# EAGLE board final (EAGLE 9.6.2)
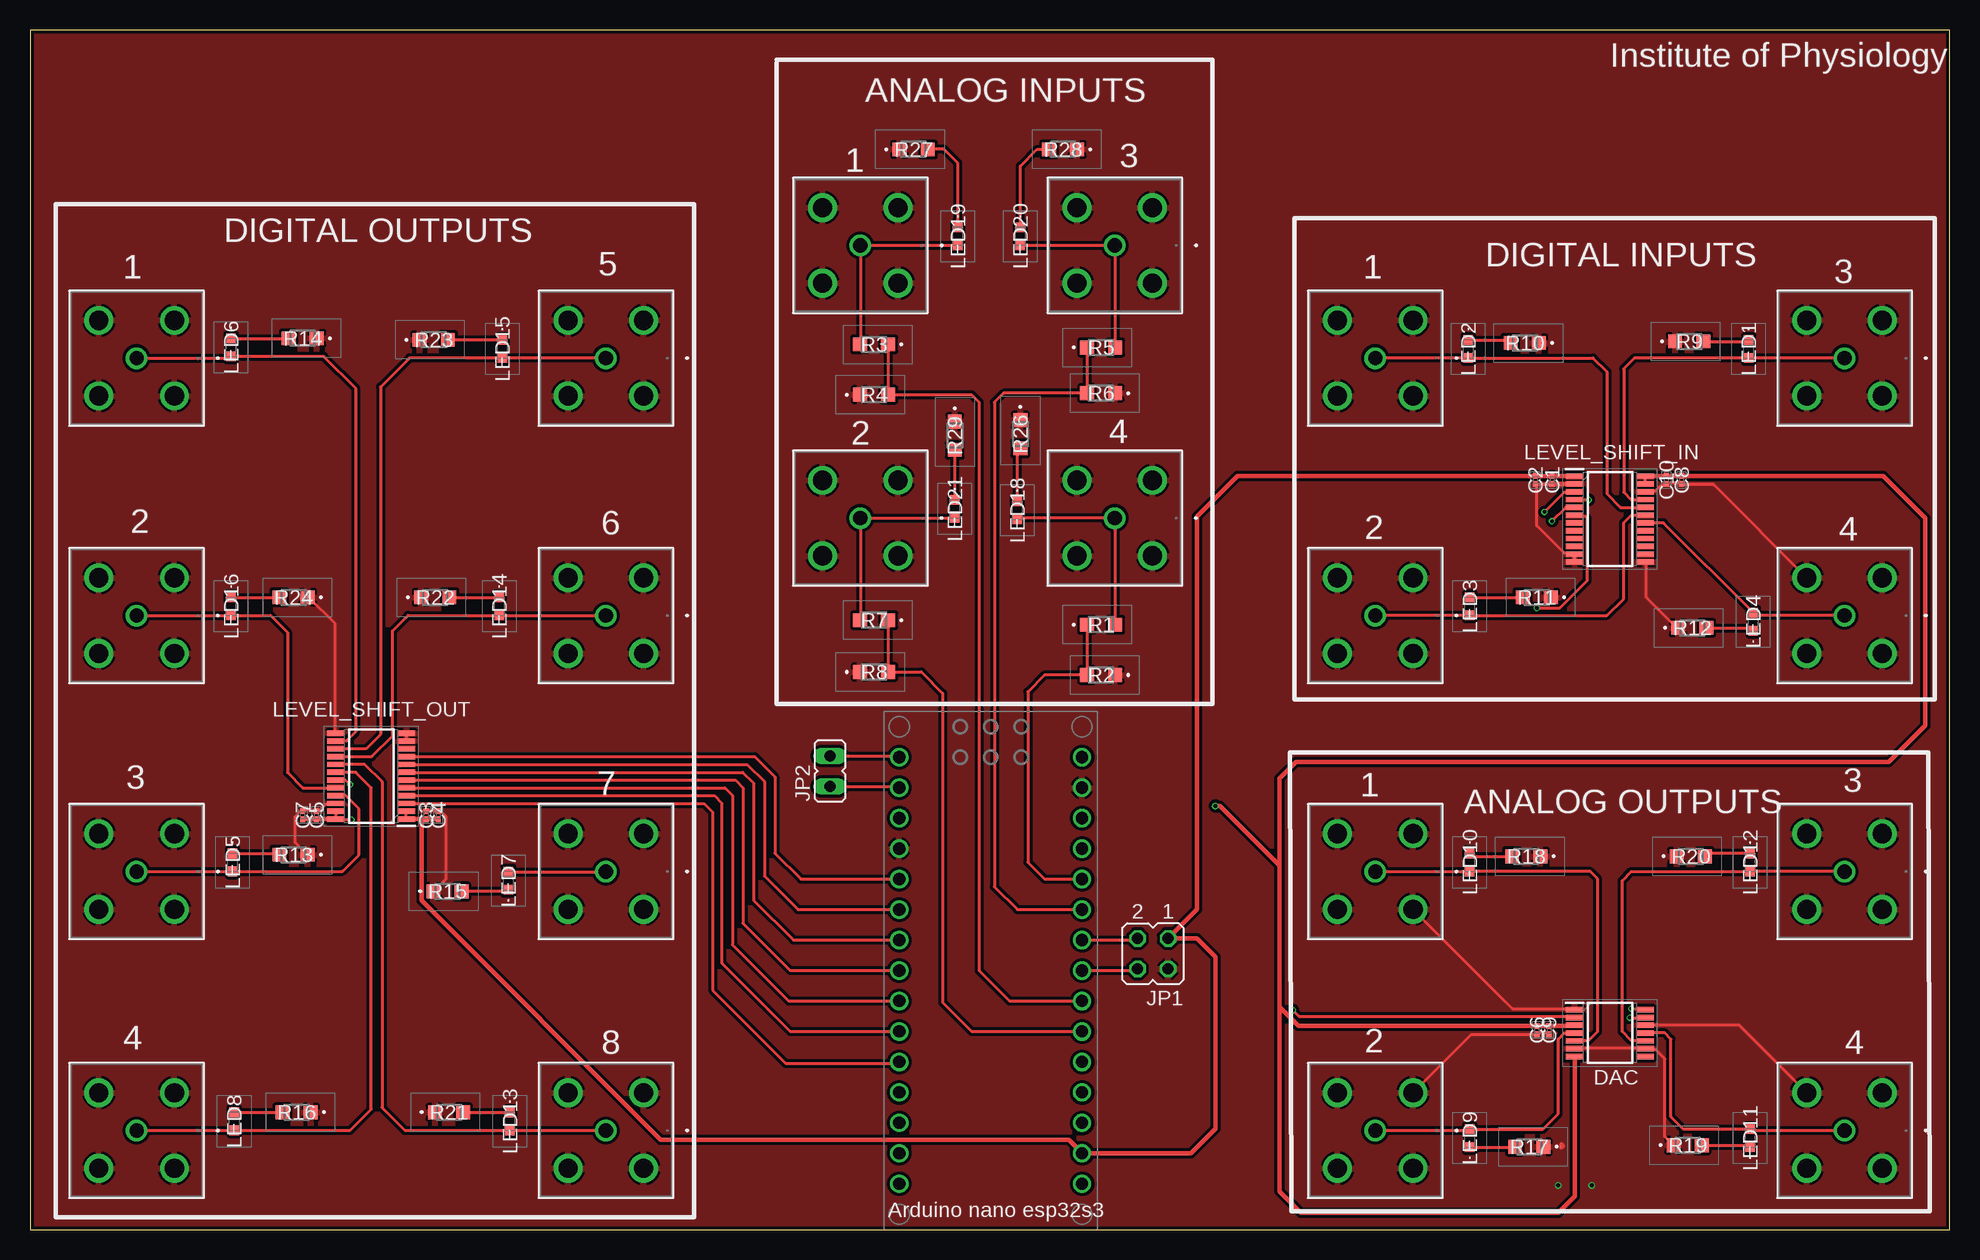
[diagram p0: board, top side]
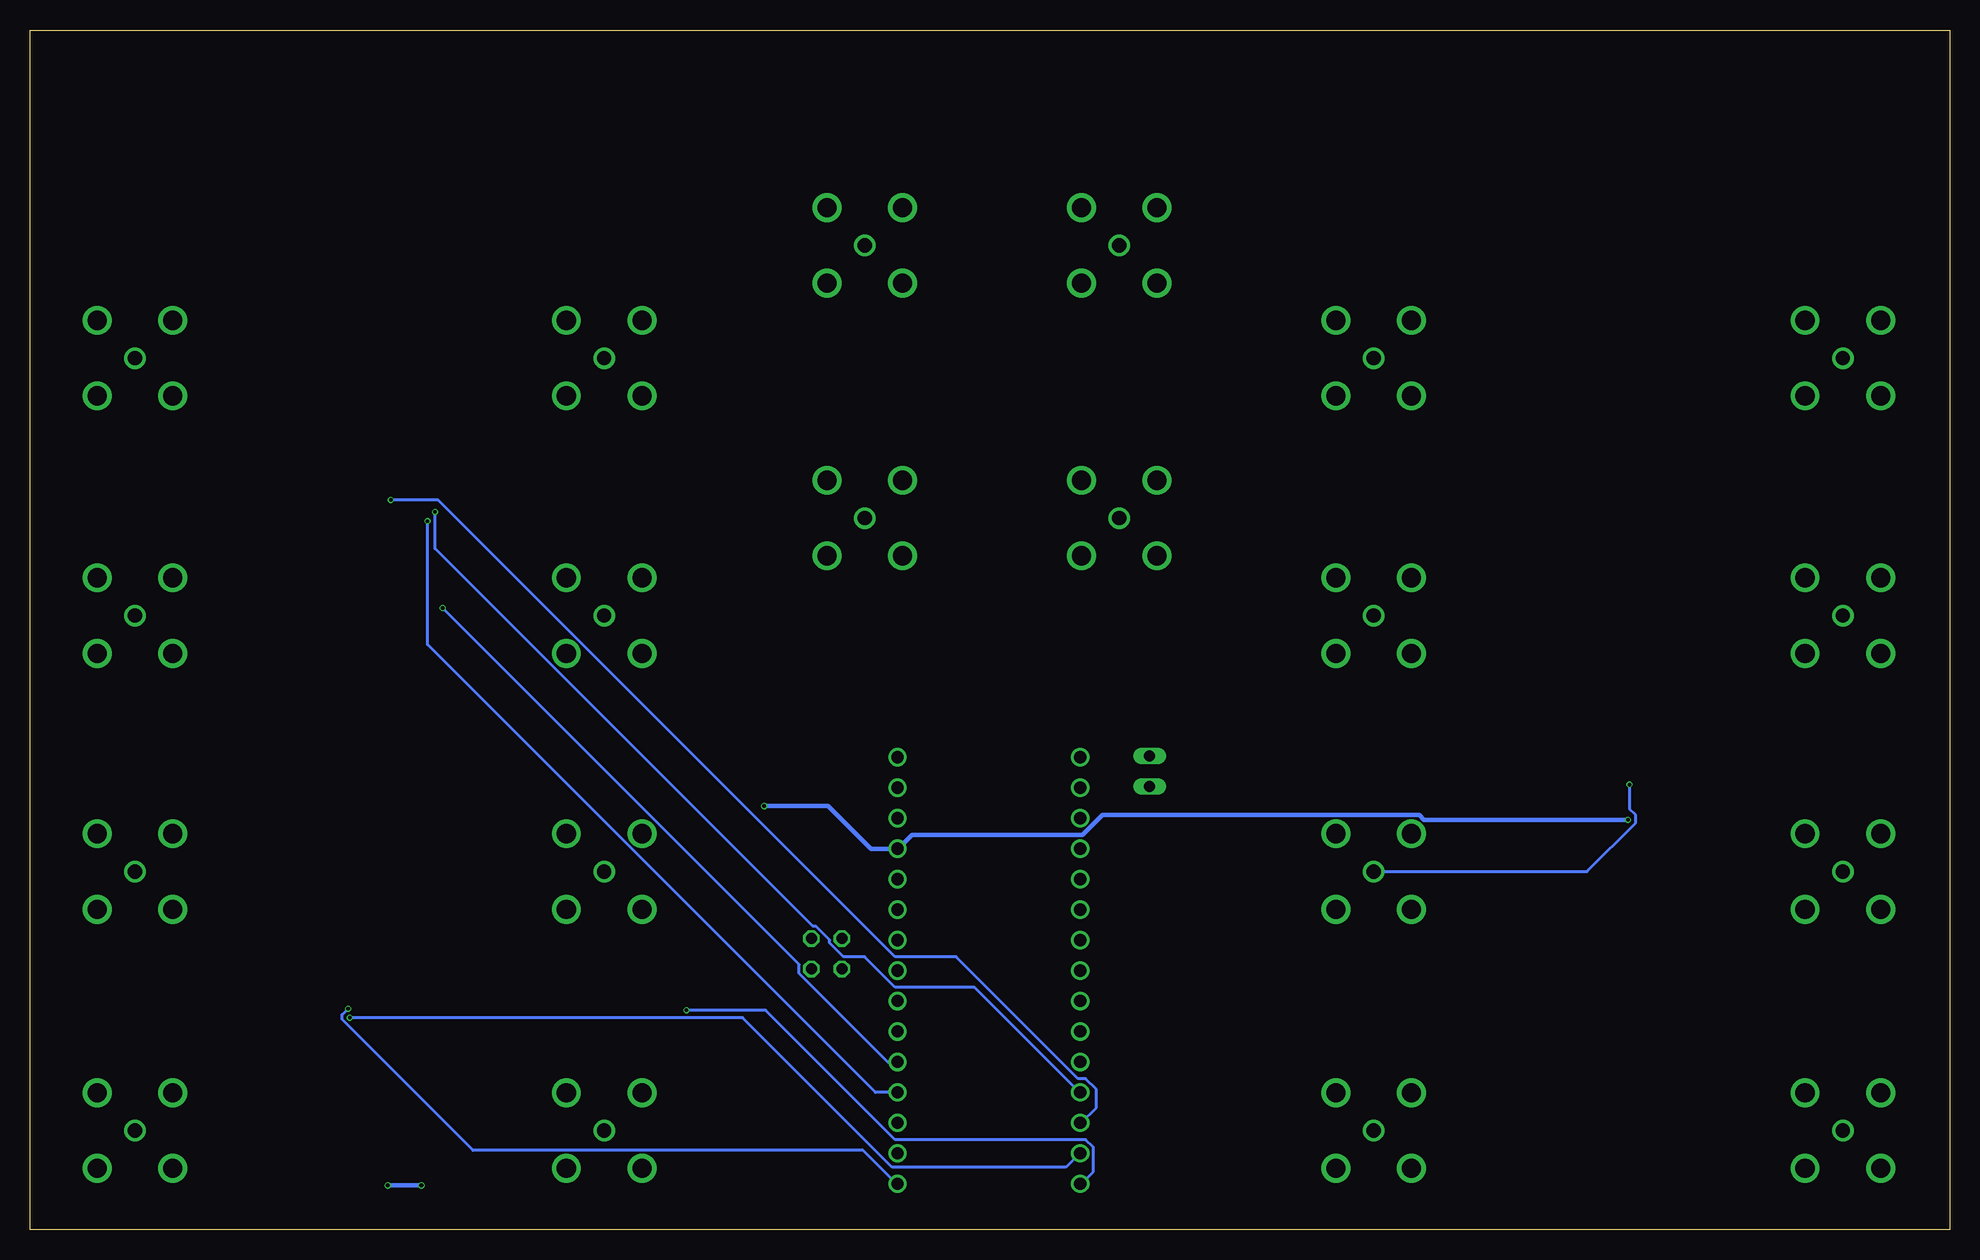
[diagram p1: board, bottom side, seen from below]

Size 160 x 100 mm. Coordinates in mm from the lower left corner, seen from the top.
Outline: 0,100 0,0 160,0 160,100 0,100
Copper layers (1*16): Top 0.035mm / dielectric 1.5mm / Bottom 0.035mm
Design rules "PCBWay_2L_152um-Track *": minimum track width 10mil, minimum drill 0.3mm, track to track 10mil, track to pad 6mil, pad to pad 6mil, via to via 6mil, smd to smd 0mil, copper to edge 0.3mm, drill to drill 10mil, minimum pad ring 6mil, minimum via ring 0.1mm, stop-mask expansion 2mil, vias tented up to drill 0.45mm, thermal gap 0.2mm

## Footprints (pad centres in the part's own frame; a part is rotated, then mirrored left to right if it is on the bottom)
CAPC0603X33N = smd 0.46 x 0.42: 1 -0.33,0; 2 0.33,0
SOP65P640X120-14N = smd 1.475 x 0.45: 1 -2.938,1.95; 2 -2.938,1.3; 3 -2.938,0.65; 4 -2.938,0; 5 -2.938,-0.65; 6 -2.938,-1.3; 7 -2.938,-1.95; 8 2.938,-1.95; 9 2.938,-1.3; 10 2.938,-0.65; 11 2.938,0; 12 2.938,0.65; 13 2.938,1.3; 14 2.938,1.95
NANO = drill 1.016: 1 -7.62,17.78; 2 -7.62,15.24; 3 -7.62,12.7; 4 -7.62,10.16; 5 -7.62,7.62; 6 -7.62,5.08; 7 -7.62,2.54; 8 -7.62,0; 9 -7.62,-2.54; 10 -7.62,-5.08; 11 -7.62,-7.62; 12 -7.62,-10.16; 13 -7.62,-12.7; 14 -7.62,-15.24; 15 -7.62,-17.78; 16 7.62,-17.78; 17 7.62,-15.24; 18 7.62,-12.7; 19 7.62,-10.16; 20 7.62,-7.62; 21 7.62,-5.08; 22 7.62,-2.54; 23 7.62,0; 24 7.62,2.54; 25 7.62,5.08; 26 7.62,7.62; 27 7.62,10.16; 28 7.62,12.7; 29 7.62,15.24; 30 7.62,17.78
COAX4_CONBNC001_TEC = drill 1.194 pad 1.702: 1 0,0 | drill 1.6 pad 2.108: 2 -3.15,3.15; 3 -3.15,-3.15; 4 3.15,-3.15; 5 3.15,3.15
JP2Q = drill 0.914 octagon: 1 -1.27,-1.27; 2 -1.27,1.27; 3 1.27,-1.27; 4 1.27,1.27
JP1 = drill 0.914 long: 1 0,-1.27; 2 0,1.27
KBEELP4112P1R2363X4X5R18 = smd 0.8 x 0.8: 1 -0.75,0; 2 0.75,0
SOP65P640X120-24N = smd 1.475 x 0.45: 1 -2.938,3.575; 2 -2.938,2.925; 3 -2.938,2.275; 4 -2.938,1.625; 5 -2.938,0.975; 6 -2.938,0.325; 7 -2.938,-0.325; 8 -2.938,-0.975; 9 -2.938,-1.625; 10 -2.938,-2.275; 11 -2.938,-2.925; 12 -2.938,-3.575; 13 2.938,-3.575; 14 2.938,-2.925; 15 2.938,-2.275; 16 2.938,-1.625; 17 2.938,-0.975; 18 2.938,-0.325; 19 2.938,0.325; 20 2.938,0.975; 21 2.938,1.625; 22 2.938,2.275; 23 2.938,2.925; 24 2.938,3.575
ERJS06_U06_(0805) = smd 1.15 x 1.15: 1 -1.175,0; 2 1.175,0

## Placement (x,y rotation side)
C1  1uf  [CAPC0603X33N]  126.87,62.48 90 top
C2  0.1uf  [CAPC0603X33N]  125.48,62.48 90 top
C3  1uf  [CAPC0603X33N]  33.02,34.54 270 top
C4  0.1uf  [CAPC0603X33N]  34.04,34.54 270 top
C5  1uf  [CAPC0603X33N]  23.88,34.54 90 top
C6  0.1uf  [CAPC0603X33N]  125.6,16.64 270 top
C7  1uf  [CAPC0603X33N]  22.73,34.54 90 top
C8  0.1uf  [CAPC0603X33N]  137.67,62.48 270 top
C9  1uf  [CAPC0603X33N]  126.62,16.64 270 top
C10  0.1uf  [CAPC0603X33N]  136.4,62.48 270 top
DAC  DAC80004IPW  [SOP65P640X120-14N]  131.7,16.38 0 top
J1  NANO_FOOTPRINT  [NANO]  80.07,21.59 0 top
J2  CONBNC001COAX4_CONBNC001_TEC  [COAX4_CONBNC001_TEC]  48.01,8.26 0 top
J3  CONBNC001COAX4_CONBNC001_TEC  [COAX4_CONBNC001_TEC]  48.01,51.18 0 top
J4  CONBNC001COAX4_CONBNC001_TEC  [COAX4_CONBNC001_TEC]  48.01,72.64 0 top
J5  CONBNC001COAX4_CONBNC001_TEC  [COAX4_CONBNC001_TEC]  8.89,51.18 0 top
J6  CONBNC001COAX4_CONBNC001_TEC  [COAX4_CONBNC001_TEC]  151.26,72.64 0 top
J7  CONBNC001COAX4_CONBNC001_TEC  [COAX4_CONBNC001_TEC]  112.14,72.64 0 top
J8  CONBNC001COAX4_CONBNC001_TEC  [COAX4_CONBNC001_TEC]  112.14,51.18 0 top
J9  CONBNC001COAX4_CONBNC001_TEC  [COAX4_CONBNC001_TEC]  151.26,51.18 0 top
J10  CONBNC001COAX4_CONBNC001_TEC  [COAX4_CONBNC001_TEC]  112.14,8.26 0 top
J11  CONBNC001COAX4_CONBNC001_TEC  [COAX4_CONBNC001_TEC]  112.14,29.84 0 top
J12  CONBNC001COAX4_CONBNC001_TEC  [COAX4_CONBNC001_TEC]  151.26,8.26 0 top
J13  CONBNC001COAX4_CONBNC001_TEC  [COAX4_CONBNC001_TEC]  151.26,29.84 0 top
J14  CONBNC001COAX4_CONBNC001_TEC  [COAX4_CONBNC001_TEC]  8.89,29.84 0 top
J15  CONBNC001COAX4_CONBNC001_TEC  [COAX4_CONBNC001_TEC]  8.89,72.64 0 top
J16  CONBNC001COAX4_CONBNC001_TEC  [COAX4_CONBNC001_TEC]  48.01,29.84 0 top
J17  CONBNC001COAX4_CONBNC001_TEC  [COAX4_CONBNC001_TEC]  8.89,8.26 0 top
J22  CONBNC001COAX4_CONBNC001_TEC  [COAX4_CONBNC001_TEC]  69.22,82.04 0 top
J23  CONBNC001COAX4_CONBNC001_TEC  [COAX4_CONBNC001_TEC]  90.42,82.04 0 top
J24  CONBNC001COAX4_CONBNC001_TEC  [COAX4_CONBNC001_TEC]  69.22,59.31 0 top
J25  CONBNC001COAX4_CONBNC001_TEC  [COAX4_CONBNC001_TEC]  90.42,59.31 0 top
JP1  [JP2Q]  93.6,22.99 180 top
JP2  [JP1]  66.67,38.23 0 top
LED1  KB_EELP41.12-P1R2-36-3X4X-5-R1  [KBEELP4112P1R2363X4X5R18]  143.26,73.41 270 top
LED2  KB_EELP41.12-P1R2-36-3X4X-5-R1  [KBEELP4112P1R2363X4X5R18]  119.89,73.41 270 top
LED3  KB_EELP41.12-P1R2-36-3X4X-5-R1  [KBEELP4112P1R2363X4X5R18]  120.02,51.94 270 top
LED4  KB_EELP41.12-P1R2-36-3X4X-5-R1  [KBEELP4112P1R2363X4X5R18]  143.64,50.67 90 top
LED5  KB_EELP41.12-P1R2-36-3X4X-5-R1  [KBEELP4112P1R2363X4X5R18]  16.89,30.61 270 top
LED6  KB_EELP41.12-P1R2-36-3X4X-5-R1  [KBEELP4112P1R2363X4X5R18]  16.76,73.53 270 top
LED7  KB_EELP41.12-P1R2-36-3X4X-5-R1  [KBEELP4112P1R2363X4X5R18]  39.88,29.08 90 top
LED8  KB_EELP41.12-P1R2-36-3X4X-5-R1  [KBEELP4112P1R2363X4X5R18]  17.02,9.02 270 top
LED9  KB_EELP41.12-P1R2-36-3X4X-5-R1  [KBEELP4112P1R2363X4X5R18]  120.02,7.62 90 top
LED10  KB_EELP41.12-P1R2-36-3X4X-5-R1  [KBEELP4112P1R2363X4X5R18]  120.02,30.61 270 top
LED11  KB_EELP41.12-P1R2-36-3X4X-5-R1  [KBEELP4112P1R2363X4X5R18]  143.38,7.62 90 top
LED12  KB_EELP41.12-P1R2-36-3X4X-5-R1  [KBEELP4112P1R2363X4X5R18]  143.38,30.61 270 top
LED13  KB_EELP41.12-P1R2-36-3X4X-5-R1  [KBEELP4112P1R2363X4X5R18]  40.01,9.02 270 top
LED14  KB_EELP41.12-P1R2-36-3X4X-5-R1  [KBEELP4112P1R2363X4X5R18]  39.12,51.94 270 top
LED15  KB_EELP41.12-P1R2-36-3X4X-5-R1  [KBEELP4112P1R2363X4X5R18]  39.37,73.41 270 top
LED16  KB_EELP41.12-P1R2-36-3X4X-5-R1  [KBEELP4112P1R2363X4X5R18]  16.76,51.94 270 top
LED18  KB_EELP41.12-P1R2-36-3X4X-5-R1  [KBEELP4112P1R2363X4X5R18]  82.3,59.94 270 top
LED19  KB_EELP41.12-P1R2-36-3X4X-5-R1  [KBEELP4112P1R2363X4X5R18]  77.34,82.8 270 top
LED20  KB_EELP41.12-P1R2-36-3X4X-5-R1  [KBEELP4112P1R2363X4X5R18]  82.55,82.8 270 top
LED21  KB_EELP41.12-P1R2-36-3X4X-5-R1  [KBEELP4112P1R2363X4X5R18]  77.09,60.07 270 top
LEVEL_SHIFT_IN  SN74LXC8T245PWR  [SOP65P640X120-24N]  131.7,59.23 0 top
LEVEL_SHIFT_OUT  SN74LXC8T245PWR  [SOP65P640X120-24N]  28.45,37.8 180 top
R1  10K  [ERJS06_U06_(0805)]  89.28,50.42 0 top
R2  18K  [ERJS06_U06_(0805)]  89.28,46.23 180 top
R3  10K  [ERJS06_U06_(0805)]  70.36,73.79 180 top
R4  18K  [ERJS06_U06_(0805)]  70.36,69.6 0 top
R5  10K  [ERJS06_U06_(0805)]  89.28,73.53 0 top
R6  18K  [ERJS06_U06_(0805)]  89.28,69.72 180 top
R7  10K  [ERJS06_U06_(0805)]  70.36,50.8 180 top
R8  18K  [ERJS06_U06_(0805)]  70.36,46.48 0 top
R9  450ohm  [ERJS06_U06_(0805)]  138.3,74.04 0 top
R10  450ohm  [ERJS06_U06_(0805)]  124.59,73.91 180 top
R11  450ohm  [ERJS06_U06_(0805)]  125.6,52.7 180 top
R12  450ohm  [ERJS06_U06_(0805)]  138.56,50.16 0 top
R13  450ohm  [ERJS06_U06_(0805)]  21.97,31.24 180 top
R14  450ohm  [ERJS06_U06_(0805)]  22.73,74.3 180 top
R15  450ohm  [ERJS06_U06_(0805)]  34.8,28.19 0 top
R16  450ohm  [ERJS06_U06_(0805)]  22.23,9.78 180 top
R17  450ohm  [ERJS06_U06_(0805)]  124.97,6.9 180 top
R18  450ohm  [ERJS06_U06_(0805)]  124.71,31.11 180 top
R19  450ohm  [ERJS06_U06_(0805)]  138.18,7.03 0 top
R20  450ohm  [ERJS06_U06_(0805)]  138.43,31.11 0 top
R21  450ohm  [ERJS06_U06_(0805)]  34.92,9.78 0 top
R22  450ohm  [ERJS06_U06_(0805)]  33.78,52.7 0 top
R23  450ohm  [ERJS06_U06_(0805)]  33.66,74.17 0 top
R24  450ohm  [ERJS06_U06_(0805)]  21.97,52.7 180 top
R26  450ohm  [ERJS06_U06_(0805)]  82.55,66.29 270 top
R27  450ohm  [ERJS06_U06_(0805)]  73.66,90.04 0 top
R28  450ohm  [ERJS06_U06_(0805)]  86.11,90.04 180 top
R29  450ohm  [ERJS06_U06_(0805)]  77.09,66.17 270 top

## Library data of the parts
C1-C10 = LMK063BJ104KP-F; DESCRIPTION: 0201 (0603M), 0402 (1005M) 100nF MLCC 10V dc +/-10% SMD; HEIGHT: 0.33mm; MANUFACTURER_NAME: TAIYO YUDEN; MANUFACTURER_PART_NUMBER: LMK063BJ104KP-F; MOUSER_PART_NUMBER: 963-LMK063BJ104KP-F; MOUSER_PRICE-STOCK: https://www.mouser.co.uk/ProductDetail/TAIYO-YUDEN/LMK063BJ104KP-F?qs=PzICbMaShUfoGDdA8Slokg%3D%3D
DAC = DAC80004IPW; DESCRIPTION: Ultra-Small, true 16-bit quad voltage output DAC with 1LSB INL/DNL; HEIGHT: 1.2mm; MANUFACTURER_NAME: Texas Instruments; MANUFACTURER_PART_NUMBER: DAC80004IPW; MOUSER_PART_NUMBER: 595-DAC80004IPW; MOUSER_PRICE-STOCK: https://www.mouser.co.uk/ProductDetail/Texas-Instruments/DAC80004IPW?qs=c6XsS7fV8bVzh9Ua4BmvdA%3D%3D
J1 = SparkFun-Boards
J2-J17 J22-J25 = CONBNC001; COPYRIGHT: Copyright (C) 2025 Ultra Librarian. All rights reserved.; MANUFACTURER_PART_NUMBER: CONBNC001; MFR_NAME: TE Connectivity; TYPE: Coaxial Connectors(RF) Assemblies
JP1 JP2 = jumper
LED1-LED16 LED18-LED21 = KB_EELP41.12-P1R2-36-3X4X-5-R1; DESCRIPTION: LED, InGaN on Sapphire, Blue, SMD, 0603 [1608 Metric], 5 mA, 2.75 V, 474 nm; HEIGHT: 0.5mm; MANUFACTURER_NAME: ams OSRAM; MANUFACTURER_PART_NUMBER: KB EELP41.12-P1R2-36-3X4X-5-R18; MOUSER_PART_NUMBER: 720-P4112P1R2363X4X5; MOUSER_PRICE-STOCK: https://www.mouser.co.uk/ProductDetail/ams-OSRAM/KB-EELP41.12-P1R2-36-3X4X-5-R18?qs=ZcfC38r4PosE94aiRwY9DA%3D%3D
LEVEL_SHIFT_IN LEVEL_SHIFT_OUT = SN74LXC8T245PWR; DESCRIPTION: Bus Transceivers 8-bit dual-supply bus transceiver with configurable voltage-level shifting and three-state outputs 24-TSSOP -40 to 125; HEIGHT: 1.2mm; MANUFACTURER_NAME: Texas Instruments; MANUFACTURER_PART_NUMBER: SN74LXC8T245PWR; MOUSER_PART_NUMBER: 595-SN74LXC8T245PWR; MOUSER_PRICE-STOCK: https://www.mouser.co.uk/ProductDetail/Texas-Instruments/SN74LXC8T245PWR?qs=KUoIvG%2F9IlbX1EGPKlr3TQ%3D%3D
R1-R24 R26-R29 = ERJ-U06D1002V; DESCRIPTION: Anti-Sulfurated Thick Film Chip Resistor, 0805, 0.125W; HEIGHT: 0.7mm; MANUFACTURER_NAME: Panasonic; MANUFACTURER_PART_NUMBER: ERJ-U06D1002V

## Nets
3.3V [POWER]: C1.2 C2.2 C3.2 C4.2 J1.17 JP1.1 LEVEL_SHIFT_IN.1 LEVEL_SHIFT_OUT.1 LEVEL_SHIFT_OUT.2
5V [POWER]: C5.1 C6.1 C7.1 C8.1 C9.1 C10.1 DAC.3 DAC.7 J1.27 LEVEL_SHIFT_IN.23 LEVEL_SHIFT_IN.24 LEVEL_SHIFT_OUT.23 LEVEL_SHIFT_OUT.24
GND [POWER]: C1.1 C2.1 C3.1 C4.1 C5.2 C6.2 C7.2 C8.2 C9.2 C10.2 DAC.1 DAC.6 DAC.9 DAC.12 J1.4 J1.29 J2.2 J2.3 J2.4 J2.5 J3.2 J3.3 J3.4 J3.5 J4.2 J4.3 J4.4 J4.5 J5.2 J5.3 J5.4 J5.5 J6.2 J6.3 J6.4 J6.5 J7.2 J7.3 J7.4 J7.5 J8.2 J8.3 J8.4 J8.5 J9.2 J9.3 J9.4 J9.5 J10.2 J10.3 J10.4 J10.5 J11.2 J11.3 J11.4 J11.5 J12.2 J12.3 J12.4 J12.5 J13.2 J13.3 J13.4 J13.5 J14.2 J14.3 J14.4 J14.5 J15.2 J15.3 J15.4 J15.5 J16.2 J16.3 J16.4 J16.5 J17.2 J17.3 J17.4 J17.5 J22.2 J22.3 J22.4 J22.5 J23.2 J23.3 J23.4 J23.5 J24.2 J24.3 J24.4 J24.5 J25.2 J25.3 J25.4 J25.5 JP1.2 LEVEL_SHIFT_IN.2 LEVEL_SHIFT_IN.11 LEVEL_SHIFT_IN.12 LEVEL_SHIFT_IN.13 LEVEL_SHIFT_IN.22 LEVEL_SHIFT_OUT.11 LEVEL_SHIFT_OUT.12 LEVEL_SHIFT_OUT.13 LEVEL_SHIFT_OUT.22 R2.1 R4.1 R6.1 R8.1 R9.1 R10.1 R11.1 R12.1 R13.1 R14.1 R15.1 R16.1 R17.1 R18.1 R19.1 R20.1 R21.1 R22.1 R23.1 R24.1 R26.1 R27.1 R28.1 R29.1
N$6: J1.10 LEVEL_SHIFT_OUT.4
N$11: J1.9 LEVEL_SHIFT_OUT.5
N$16: J1.8 LEVEL_SHIFT_OUT.6
N$21: J14.1 LED5.2 LEVEL_SHIFT_OUT.21
N$22: J15.1 LED6.2 LEVEL_SHIFT_OUT.14
N$23: J16.1 LED7.2 LEVEL_SHIFT_OUT.19
N$24: J17.1 LED8.2 LEVEL_SHIFT_OUT.18
N$28: J1.11 LEVEL_SHIFT_OUT.3
N$29: J1.7 LEVEL_SHIFT_OUT.7
N$30: J1.6 LEVEL_SHIFT_OUT.8
N$31: J1.5 LEVEL_SHIFT_OUT.9
N$32: J6.1 LED1.2 LEVEL_SHIFT_IN.21
N$33: J7.1 LED2.2 LEVEL_SHIFT_IN.20
N$34: J8.1 LED3.2 LEVEL_SHIFT_IN.19
N$35: J1.12 LEVEL_SHIFT_IN.3
N$36: J1.13 LEVEL_SHIFT_IN.4
N$37: J1.19 LEVEL_SHIFT_IN.5
N$38: J1.20 LEVEL_SHIFT_IN.6
N$39: J9.1 LED4.2 LEVEL_SHIFT_IN.18
N$40: DAC.14 J1.16
N$41: DAC.13 J1.14
N$42: DAC.2 J1.15
N$43: DAC.4 J10.1 LED9.2
N$44: DAC.5 J11.1 LED10.2
N$45: DAC.11 J12.1 LED11.2
N$46: J3.1 LED14.2 LEVEL_SHIFT_OUT.16
N$47: J25.1 LED18.2 R1.2
N$48: J1.26 R1.1 R2.2
N$49: J22.1 LED19.2 R3.2
N$50: J23.1 LED20.2 R5.2
N$51: J24.1 LED21.2 R7.2
N$52: J1.22 R3.1 R4.2
N$53: J1.25 R5.1 R6.2
N$54: J1.21 R7.1 R8.2
N$55: LED1.1 R9.2
N$56: LED14.1 R22.2
N$57: LED2.1 R10.2
N$58: J4.1 LED15.2 LEVEL_SHIFT_OUT.15
N$59: LED3.1 R11.2
N$60: LED15.1 R23.2
N$61: LED4.1 R12.2
N$62: J5.1 LED16.2 LEVEL_SHIFT_OUT.20
N$63: LED5.1 R13.2
N$64: LED16.1 R24.2
N$65: LED6.1 R14.2
N$67: LED7.1 R15.2
N$69: LED8.1 R16.2
N$71: LED9.1 R17.2
N$72: LED18.1 R26.2
N$73: LED10.1 R18.2
N$75: LED11.1 R19.2
N$76: DAC.10 J13.1 LED12.2
N$77: LED12.1 R20.2
N$78: J2.1 LED13.2 LEVEL_SHIFT_OUT.17
N$79: LED13.1 R21.2
N$80: LED19.1 R27.2
N$82: LED20.1 R28.2
N$84: LED21.1 R29.2
RX: J1.2 JP2.1
SCL: J1.24 JP1.3
SDA: J1.23 JP1.4
TX: J1.1 JP2.2

## Tracks (layer width: path | path; a pad name or v marks a point on that pad's centre or on a via)
3.3V
  Top 0.254: LEVEL_SHIFT_OUT.2 31.37,34.8 31.37,34.29 LEVEL_SHIFT_OUT.1
  Top 0.381: LEVEL_SHIFT_OUT.1 32.64,34.22 | 32.64,34.22 C3.2 C4.2 | 32.64,34.22 32.64,27.43 52.58,7.49 86.61,7.49 87.69,6.41 J1.17 96.77,6.35 98.81,8.38 98.81,22.73 97.28,24.26 JP1.1 97.28,26.67 97.28,59.44 100.66,62.81 C2.2 C1.2 LEVEL_SHIFT_IN.1
5V  (via drill 0.3, 0.35)
  Top 0.254: 126.64,16.99 C9.1 | LEVEL_SHIFT_OUT.23 25.53,34.8 25.53,34.29 LEVEL_SHIFT_OUT.24 25.65,34.16 v26.8,34.16 | LEVEL_SHIFT_IN.23 134.62,62.23 134.62,62.74 LEVEL_SHIFT_IN.24
  Top 0.381: 104.14,30.35 104.14,18.54 | DAC.3 128.72,16.99 126.64,16.99 | C9.1 C6.1 105.72,16.97 104.14,18.54 | 104.14,30.35 104.14,37.59 105.54,38.99 154.94,38.99 157.99,42.04 157.99,59.31 154.48,62.81 C8.1 C10.1 LEVEL_SHIFT_IN.24 | LEVEL_SHIFT_OUT.24 C5.1 C7.1 | v98.81,35.31 99.19,35.31 104.14,30.35 | 104.14,18.54 104.14,3.17 105.92,1.4 127.38,1.4 128.76,2.78 DAC.7
  Bottom 0.254: 87.63,31.75 J1.27
  Bottom 0.381: v26.8,34.16 43.81,34.16 44.2,34.54 70.61,34.54 72.26,32.89 86.49,32.89 87.63,31.75 | J1.27 89.92,31.75 93.47,35.31 v98.81,35.31
GND  (via drill 0.35)
  Top 0.254: 137.14,7.03 R19.1 136.91,7.11 136.27,7.75 136.27,14.22 135.51,14.99 134.87,14.99 DAC.9 134.62,15.11 128.78,15.11 DAC.6 | LEVEL_SHIFT_IN.22 134.75,61.59 135.51,61.59 136.02,62.1 136.4,62.1 C10.2 136.4,62.23 137.67,62.23 C8.2 137.67,62.1 140.34,62.1 J9.2 | 23.88,34.92 22.73,34.92 C7.2 22.73,34.8 22.48,34.8 22.1,34.42 22.1,32.26 23.11,31.24 R13.1 | 23.88,34.92 24.13,34.92 24.64,35.43 25.4,35.43 LEVEL_SHIFT_OUT.22 | 23.88,34.92 C5.2 | 125.6,62.1 126.87,62.1 C1.1 126.87,62.17 | 125.6,62.1 125.48,62.1 C2.1 125.6,62.1 | C9.2 126.62,16.38 125.6,16.38 C6.2 125.6,16.26 120.14,16.26 J10.5 | C3.1 33.02,34.92 34.04,34.92 C4.1 34.04,34.8 34.29,34.8 34.67,34.42 34.67,29.21 33.66,28.19 R15.1 | LEVEL_SHIFT_OUT.13 25.4,41.4 25.4,50.55 23.24,52.7 R24.1 | LEVEL_SHIFT_OUT.11 31.37,40.77 31.37,41.27 LEVEL_SHIFT_OUT.12 | J11.4 123.57,18.41 128.65,18.41 DAC.1 | J12.2 142.49,17.02 134.75,17.02 DAC.12 | LEVEL_SHIFT_IN.12 128.78,55.75 128.78,56.26 LEVEL_SHIFT_IN.11 128.65,56.39 127.89,56.39 125.6,58.67 125.6,62.1 | LEVEL_SHIFT_IN.13 134.75,55.63 134.75,52.7 137.29,50.16 R12.1
  Top 0.381: 127.64,7.11 127.76,6.99 127.64,6.86 | LEVEL_SHIFT_IN.2 128.62,62.16 128.52,62.14 128.5,62.16 126.94,62.16 126.93,62.17 126.87,62.17
  Bottom 0.381: v127.38,3.68 v130.18,3.68
  pour Top (isolate 0.254): 0,99.95 160.02,99.95 160.02,99.06 160.02,0 158.24,0 0,0
N$6
  Top 0.254: LEVEL_SHIFT_OUT.4 57.05,36.17 57.66,35.56 57.66,22.23 63.37,16.51 J1.10
N$11
  Top 0.254: LEVEL_SHIFT_OUT.5 57.92,36.82 58.55,36.2 58.55,23.75 63.25,19.05 J1.9
N$16
  Top 0.254: LEVEL_SHIFT_OUT.6 58.8,37.47 59.44,36.83 59.44,25.53 63.37,21.59 J1.8
N$21
  Top 0.254: J14.1 16.88,29.84 LED5.2 26.05,29.86 27.43,31.24 27.43,35.05 26.31,36.17 LEVEL_SHIFT_OUT.21
N$22
  Top 0.254: J15.1 16.62,72.64 LED6.2 24.5,72.78 27.18,70.1 27.18,41.53 26.37,40.72 LEVEL_SHIFT_OUT.14
N$23  (via drill 0.3)
  Top 0.254: LED7.2 47.99,29.83 J16.1 | v26.67,37.08 26.29,37.47 25.53,37.47 LEVEL_SHIFT_OUT.19
  Bottom 0.254: v26.67,37.08 26.67,35.05 26.16,34.54 26.16,33.91 30.23,29.84 J16.1
N$24
  Top 0.254: J17.1 8.9,8.27 LED8.2 26.68,8.27 28.45,10.03 28.45,36.83 27.16,38.12 LEVEL_SHIFT_OUT.18
N$28
  Top 0.254: LEVEL_SHIFT_OUT.3 56.17,35.52 56.9,34.8 56.9,19.94 62.99,13.84 72.33,13.84 J1.11
N$29
  Top 0.254: LEVEL_SHIFT_OUT.7 59.42,38.12 60.33,37.21 60.33,27.43 63.63,24.13 J1.7
N$30
  Top 0.254: LEVEL_SHIFT_OUT.8 59.78,38.77 61.21,37.34 61.21,29.46 64.01,26.67 J1.6
N$31
  Top 0.254: LEVEL_SHIFT_OUT.9 60.4,39.42 62.1,37.72 62.1,31.37 64.26,29.21 J1.5
N$32
  Top 0.254: J6.1 143.27,72.64 LED1.2 133.74,72.66 132.84,71.75 132.84,61.47 133.45,60.86 LEVEL_SHIFT_IN.21
N$33
  Top 0.254: J7.1 119.88,72.64 LED2.2 130.29,72.66 131.44,71.5 131.44,61.34 132.58,60.21 LEVEL_SHIFT_IN.20
N$34
  Top 0.254: J8.1 120,51.18 LED3.2 131.46,51.19 132.84,52.58 132.84,58.93 133.47,59.56 LEVEL_SHIFT_IN.19
N$35  (via drill 0.3)
  Top 0.254: v126.24,59.82 127.89,61.47 128.65,61.47 LEVEL_SHIFT_IN.3
  Bottom 0.254: v126.24,59.82 126.24,56.77 94.74,25.27 94.49,25.27 93.34,24.13 93.34,23.88 92.2,22.73 90.42,22.73 87.88,20.19 81.28,20.19 72.52,11.43 J1.12
N$36  (via drill 0.3)
  Top 0.254: v129.92,60.83 128.78,60.83 LEVEL_SHIFT_IN.4
  Bottom 0.254: v129.92,60.83 125.98,60.83 87.88,22.73 82.8,22.73 72.64,12.57 72.01,12.57 71.12,11.68 71.12,10.16 72.39,8.89 J1.13
N$37  (via drill 0.3)
  Top 0.254: v126.87,59.05 128.02,60.2 128.65,60.2 LEVEL_SHIFT_IN.5
  Bottom 0.254: v126.87,59.05 126.87,48.77 89.53,11.43 J1.19
N$38  (via drill 0.3)
  Top 0.254: v125.6,51.82 127.51,51.82 129.79,54.1 129.79,59.31 129.67,59.44 128.78,59.44 LEVEL_SHIFT_IN.6
  Bottom 0.254: v125.6,51.82 95.89,22.1 95.89,21.34 88.52,13.97 J1.20
N$39
  Top 0.254: J9.1 143.88,51.18 LED4.2 136.15,58.91 LEVEL_SHIFT_IN.18
N$40  (via drill 0.3)
  Top 0.254: v133.48,18.41 134.62,18.41 DAC.14
  Bottom 0.254: v133.48,18.41 133.99,17.91 133.99,17.53 123.06,6.6 90.55,6.6 87.76,3.81 J1.16
N$41  (via drill 0.3)
  Top 0.254: v133.35,17.65 134.62,17.65 DAC.13
  Bottom 0.254: v133.35,17.65 100.58,17.65 88.14,5.21 73.66,5.21 72.52,6.35 J1.14
N$42  (via drill 0.3)
  Top 0.254: v105.28,18.29 105.79,17.78 128.65,17.78 DAC.2
  Bottom 0.254: v105.28,18.29 98.68,18.29 87.88,7.49 72.01,7.49 71.37,6.86 71.37,4.83 72.39,3.81 J1.15
N$43
  Top 0.254: J10.1 119.9,8.26 LED9.2 126.1,8.37 127.38,9.65 127.38,15.88 127.89,16.38 DAC.4
N$44
  Top 0.254: J11.1 120,29.84 | 120,29.84 LED10.2 | DAC.5 129.91,15.73 130.68,16.51 130.68,29.21 130.05,29.84 120,29.84
N$45
  Top 0.254: J12.1 143.5,8.26 LED11.2 137.81,8.37 136.78,9.4 136.78,15.88 136.27,16.38 DAC.11
N$46
  Top 0.254: J3.1 47.99,51.19 LED14.2 31.51,51.19 30.23,49.91 30.23,41.15 28.5,39.42 LEVEL_SHIFT_OUT.16
N$47
  Top 0.254: LED18.2 82.41,59.31 J25.1 90.42,50.45 R1.2
N$48
  Top 0.254: R1.1 R2.2 84.58,46.23 83.19,44.83 83.19,30.61 84.58,29.21 J1.26
N$49
  Top 0.254: LED19.2 J22.1 69.22,73.82 R3.2
N$50
  Top 0.254: LED20.2 90.41,82.05 J23.1 90.42,73.56 R5.2
N$51
  Top 0.254: LED21.2 J24.1 69.22,50.83 R7.2
N$52
  Top 0.254: R3.1 R4.2 78.49,69.6 79.12,68.96 79.12,21.59 81.66,19.05 J1.22
N$53
  Top 0.254: R5.1 R6.2 81.15,69.72 80.39,68.96 80.39,28.57 82.3,26.67 J1.25
N$54
  Top 0.254: R7.1 R8.2 74.3,46.48 76.07,44.7 76.07,18.92 78.49,16.51 J1.21
N$55
  Top 0.254: R9.2 143.14,74.04 LED1.1
N$56
  Top 0.254: R22.2 39.1,52.7 LED14.1
N$57
  Top 0.254: LED2.1 123.17,74.16 R10.2
N$58
  Top 0.254: J4.1 39.38,72.64 LED15.2 31.64,72.66 29.21,70.23 29.21,41.27 28,40.07 LEVEL_SHIFT_OUT.15
N$59
  Top 0.254: LED3.1 124.42,52.69 R11.2
N$60
  Top 0.254: R23.2 39.36,74.17 LED15.1
N$61
  Top 0.254: R12.2 143.4,50.16 LED4.1
N$62
  Top 0.254: J5.1 LED16.2 20.05,51.19 21.46,49.78 21.46,38.1 22.74,36.82 LEVEL_SHIFT_OUT.20
N$63
  Top 0.254: LED5.1 20.68,31.36 R13.2
N$64
  Top 0.254: LED16.1 20.78,52.69 R24.2
N$65
  Top 0.254: LED6.1 21.55,74.28 R14.2
N$67
  Top 0.254: LED7.1 39.74,28.19 R15.2
N$69
  Top 0.254: LED8.1 R16.2
N$71
  Top 0.254: LED9.1 123.76,6.87 R17.2
N$72
  Top 0.254: LED18.1 82.3,64.86 R26.2
N$73
  Top 0.254: LED10.1 120.26,31.11 R18.2
N$75
  Top 0.254: R19.2 143.23,7.03 LED11.1
N$76
  Top 0.254: J13.1 143.4,29.84 | 143.4,29.84 LED12.2 | DAC.10 133.49,15.73 132.72,16.51 132.72,29.08 133.48,29.84 143.4,29.84
N$77
  Top 0.254: LED12.1 139.85,31.36 R20.2
N$78
  Top 0.254: J2.1 47.99,8.27 LED13.2 31.23,8.27 29.34,10.16 29.34,37.34 27.91,38.77 LEVEL_SHIFT_OUT.17
N$79
  Top 0.254: R21.2 39.99,9.78 LED13.1
N$80
  Top 0.254: LED19.1 77.34,88.9 76.2,90.04 R27.2
N$82
  Top 0.254: LED20.1 82.55,88.65 83.95,90.04 R28.2
N$84
  Top 0.254: LED21.1 R29.2
RX
  Top 0.254: JP2.1 72.33,36.96 J1.2
SCL
  Top 0.254: J1.24 92.2,24.13 JP1.3
SDA
  Top 0.254: J1.23 92.2,21.59 JP1.4
TX
  Top 0.254: JP2.2 72.33,39.5 J1.1

## Text on the board
tNames: Institute of Physiology | ANALOG INPUTS | 3 | 1 | DIGITAL OUTPUTS | 5 | DIGITAL INPUTS | 1 | 1 | 3 | 4 | 2 | 2 | 6 | 2 | 4 | 3 | 7 | 1 | 3 | ANALOG OUTPUTS | 4 | 8 | 2 | 4 | DAC | Arduino nano esp32s3